# Altium PCB EAS_Power_24V_12V_PCB.PcbDoc
Units mm, origin at the board's own origin, x right, y up, seen from the top; angles counter-clockwise.
Board outline 49.53 x 19.68 mm, 2 copper layers (Top Layer, Bottom Layer); 10 components, 4 nets, 24 pads, 0 vias.
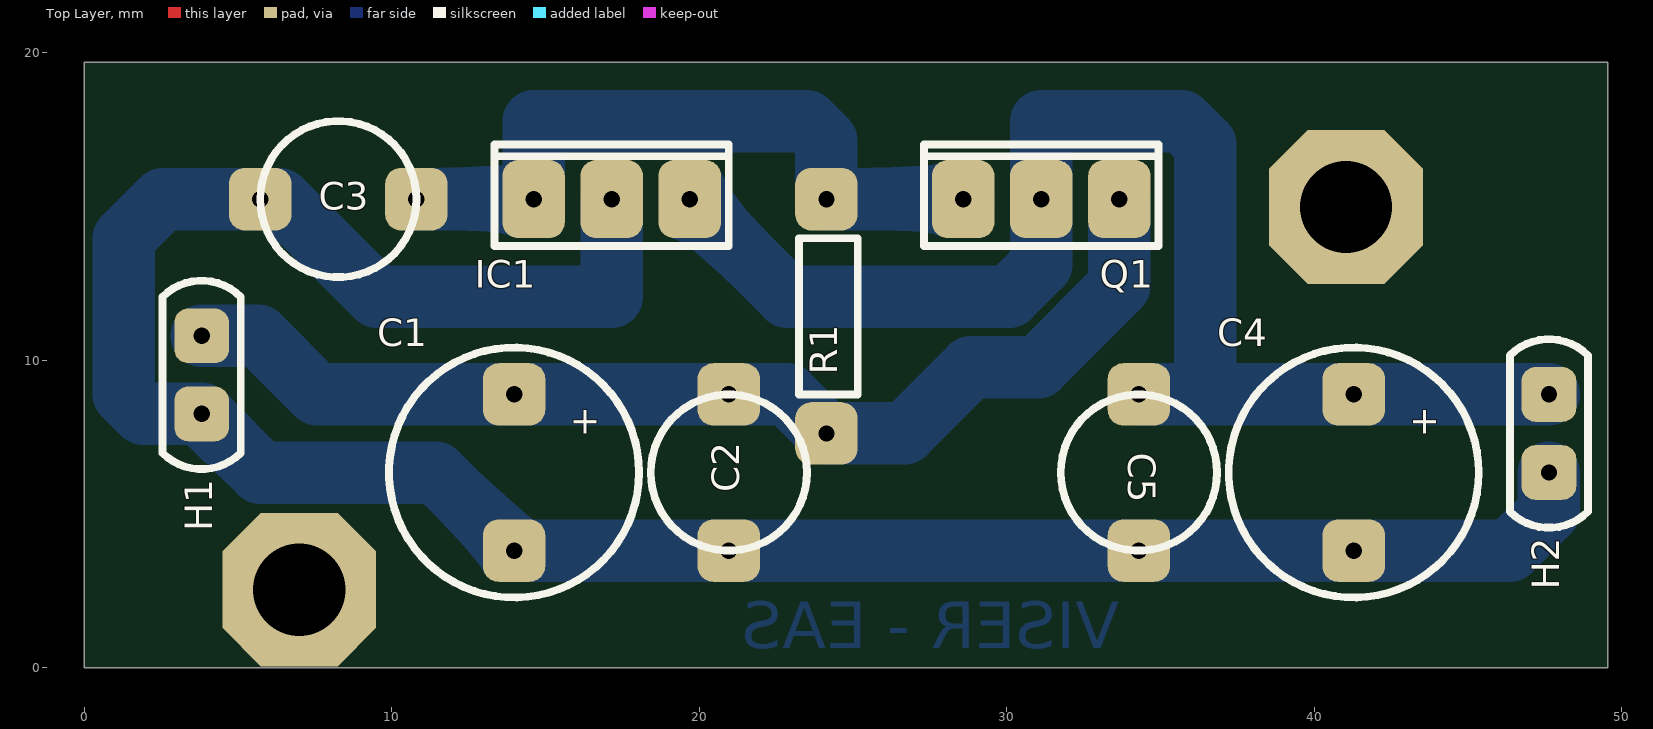
[diagram p0: Top Layer view]
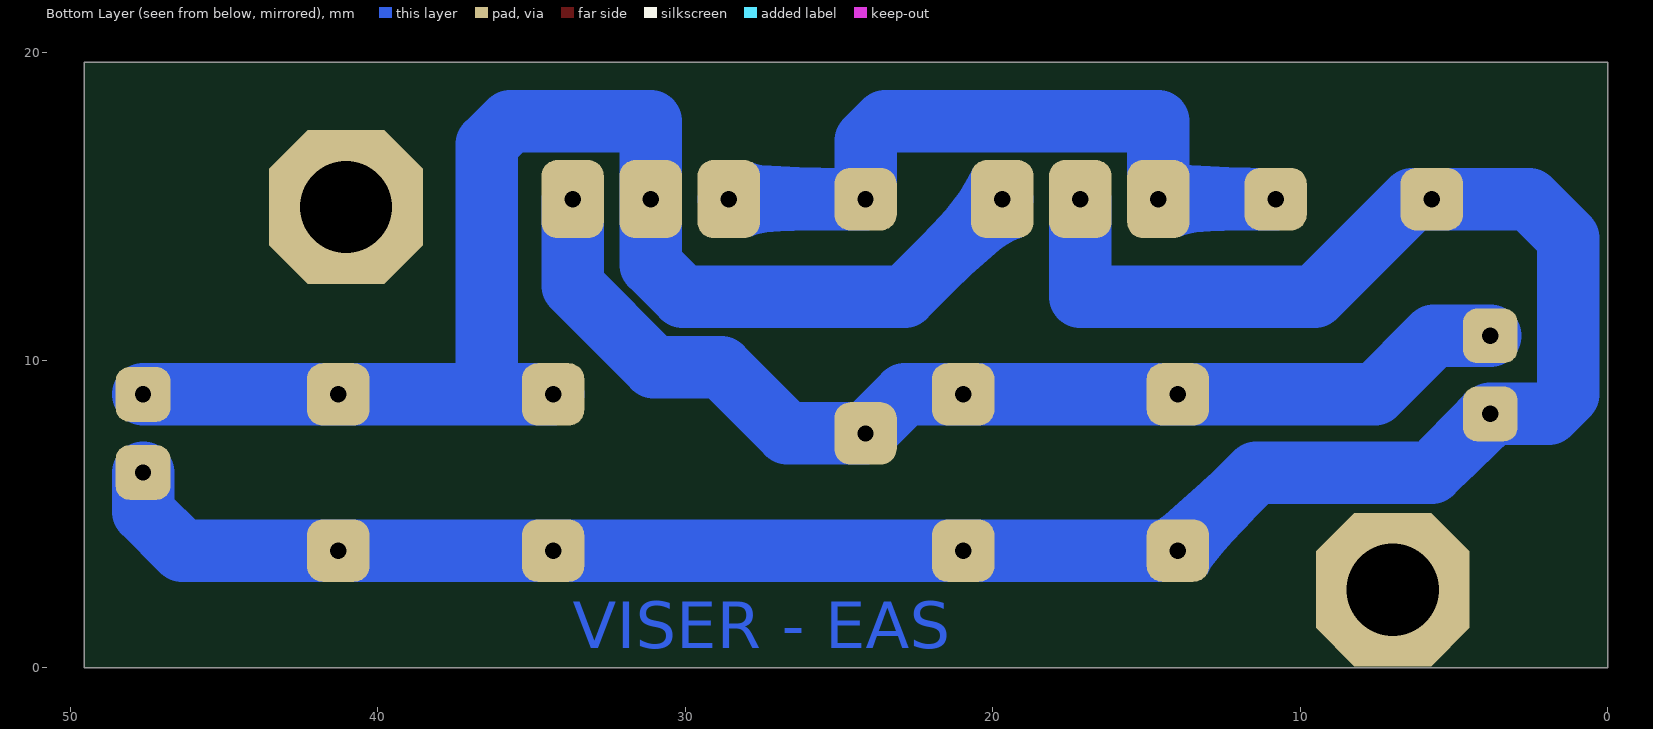
[diagram p1: Bottom Layer view, seen from below]
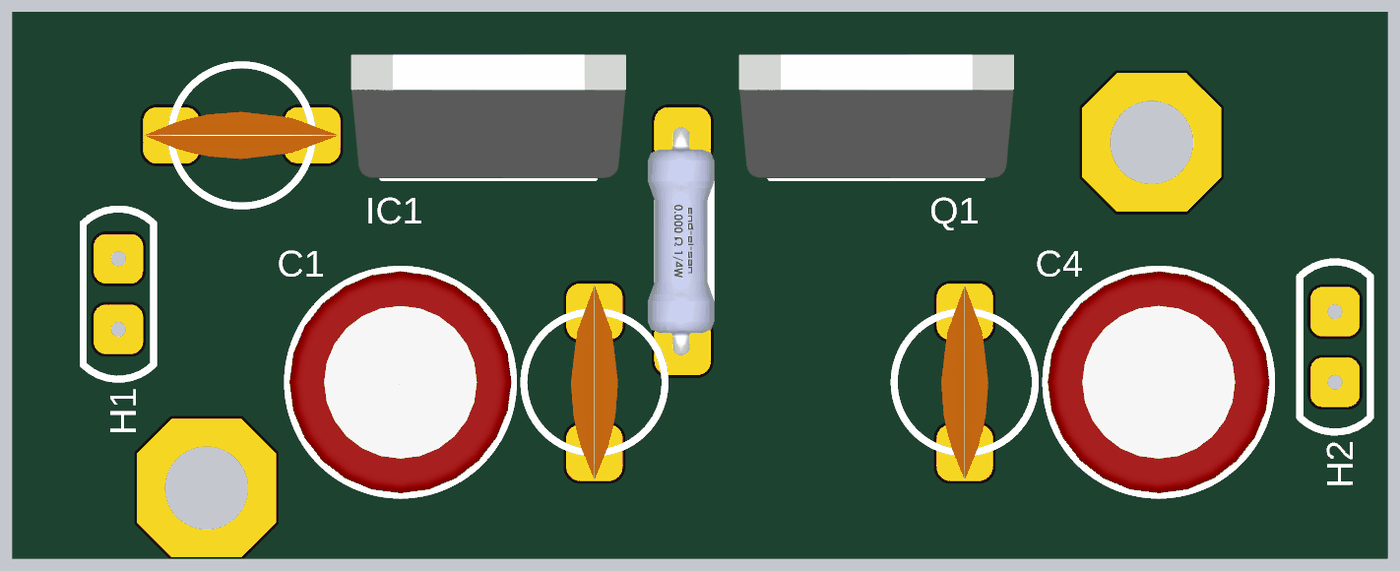
[diagram p2: 3D render of the assembled board from above, using the file's embedded part models]

## Layer stack, top to bottom
Top Solder: solder mask 0.0102, Solder Resist, Dk 3.5
Top Layer: signal copper 0.0356
Dielectric 1: dielectric 0.32, FR-4, Dk 4.8
Bottom Layer: signal copper 0.0356
Bottom Solder: solder mask 0.0102, Solder Resist, Dk 3.5

## Board outline
0,0 49.53,0 49.53,19.685 0,19.685

## Design rules (kind name [scope] priority, off if disabled: settings)
Clearance [All] p1: gap=0.254
PolygonConnect [All] p1: connectstyle=Relief reliefconductorwidth=0.254 reliefentries=4 polygonreliefangle="90 Angle" airgapwidth=0.254
RoutingVias [All] p1: holewidth=0.711 width=1.27 viastyle="Through Hole" minholewidth=0.711 minwidth=1.27 maxholewidth=0.711 maxwidth=1.27
SolderMaskExpansion [All] p1: expansion=0.102
Width [All] p1: maxlimit=2.032 minlimit=0.254 preferedwidth=1.27 toplayer_maxwidth=0.254 toplayer_prefwidth=0.254 bottomlayer_minwidth=0.508 minimp=50.000000 maximp=50.000000 favimp=50.000000
30 further rules are at their usual default settings.

## Components (designator, comment, footprint, x,y, rotation, side; value= is the part's Value field where it differs from the comment)
C1 "1000uF" C2(elektrolit) 13.97,8.89 r270 top
C2 "100n" C1(ceramic) 20.955,8.89 r270 top
C3 "1uF" C1(ceramic) 10.795,15.24 r180 top
C4 "10uF" C2(elektrolit) 41.275,8.89 r270 top
C5 "10n" C1(ceramic) 34.29,8.89 r270 top
H1 "Header1x2" Header1x2 3.81,10.795 r270 top
H2 "Header1x2" Header1x2 47.625,6.35 r90 top
IC1 "7812" TO220 14.605,15.24 r0 top
Q1 "MOSFET" TO220 28.575,15.24 r0 top
R1 "47" R1(300milsa) 24.13,15.24 r270 top

## Footprints (in the part's own frame and the unit in brackets; to place one, negate y for a bottom-side part, rotate by r counter-clockwise, add the part's x,y. Pads: shape width x height; smd on the part's side, far side on the other; paste and mask are expansions set on the pad)
C1(ceramic) [mil]
  rrect50% 80x80 hole 21: 1(0,0) 2(200,0)
  silkscreen extent 0,-100 200,100, body extent -37,-33 238,33, height 258
C2(elektrolit) [mil]
  rrect50% 80x80 hole 21: 1(0,0) 2(200,0)
  silkscreen extent -60,-160 260,160, body extent -57,-157 257,157, height 522
Header1x2 [mil]
  rrect50% 70x70 hole 21: 1(0,0) 2(100,0)
  silkscreen extent -71,-50 171,50
R1(300milsa) [mil]
  rrect50% 80x80 hole 21: 1(0,0) 2(300,0)
  silkscreen extent 50,-35 250,40, body extent -12,-49 312,45, height 95
TO220 [mil]
  rrect50% 80x100 hole 21: 1(0,0) 2(100,0) 3(200,0)
  silkscreen extent -50,-60 250,70, body extent -95,-61 295,114, height 746

## Part data
C1 C3 C4: library part C2
C2 C5: library part C1
IC1: library part 7805
Q1: library part "P-Channel MOSFET"
R1: library part R1

## Free pads (board coordinates)
  oct 5x5 hole 3: 0(6.985,2.54) 0(41.021,14.986)

## Nets (pads, with @x,y where several pads share a name; then routed paths per layer and width w, separated by ;. In a path a pad name is that pad's centre, name@x,y a point inside that pad or via, vN(x,y) a via of type N, cw(c..) or ccw(c..) an arc to the next point about the centre after c; other vN are vias at no path point)
12V: C4.1 C5.1 H2.2 IC1.3 Q1.2 | length 45
  Bottom Layer w2.032: IC1.3 22.86,12.065 30.067,12.065 31.115,13.113 Q1.2 31.115,17.78 35.687,17.78 36.449,17.018 36.449,8.89 ; C5.1 36.449,8.89 ; H2.2 C4.1 36.449,8.89
24V: C1.1 C2.1 H1.1 Q1.3 R1.2 | length 36
  Bottom Layer w2.032: H1.1 5.657,10.795 7.562,8.89 C1.1 C2.1 22.86,8.89 R1.2 26.67,7.62 28.829,9.779 31.014,9.779 33.655,12.42 Q1.3
GND: C1.2 C2.2 C3.2 C4.2 C5.2 H1.2 H2.1 IC1.2 | length 76.2
  Bottom Layer w2.032: IC1.2 17.145,12.065 9.525,12.065 6.35,15.24 C3.2 2.54,15.24 1.27,13.97 1.27,8.89 1.905,8.255 H1.2 5.715,6.35 11.43,6.35 C1.2 C2.2 C5.2 C4.2 46.355,3.81 47.625,5.08 H2.1
NetC3_1: C3.1 IC1.1 Q1.1 R1.1 | length 22.5
  Bottom Layer w2.032: C3.1 IC1.1 14.605,17.78 23.495,17.78 24.13,17.145 R1.1 Q1.1

## Other copper
Bottom Layer:
  text "VISER - EAS" at 33.655,0.635 h1.52

## Silkscreen, mask and mechanical layers (free items; w line width, h text height)
Mechanical 1:
  the board outline again, w0.254

## Text inside footprints (layer, text, board x,y; h text height)
C1: Top Overlay "+" at 15.621,8.509 h1.52 r270
C4: Top Overlay "+" at 42.926,8.509 h1.52 r270